# Altium PCB SixAxisEncoderFinARM R1.0.PcbDoc
Units mil, origin at the board's own origin, x right, y up, seen from the top; angles counter-clockwise.
Board outline 1710 x 2625 mil, 2 copper layers (Top Layer, Bottom Layer); 58 components, 57 nets, 286 pads, 158 vias.
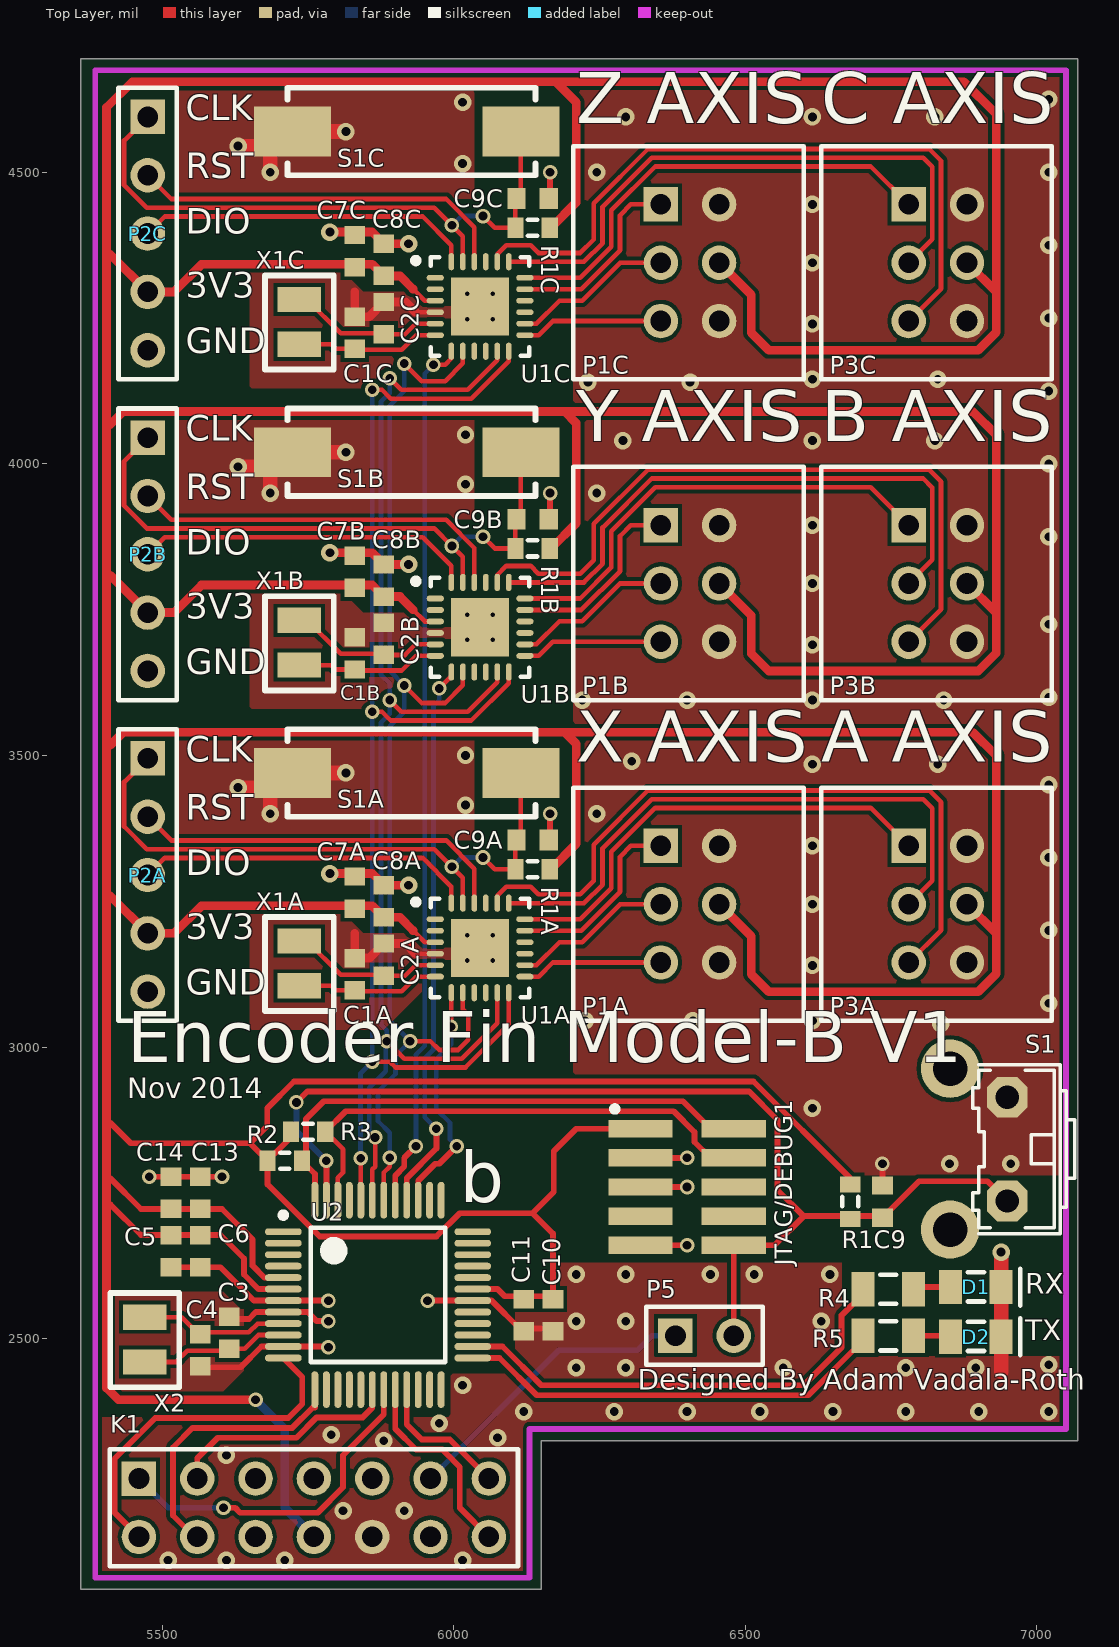
[diagram p0: Top Layer view]
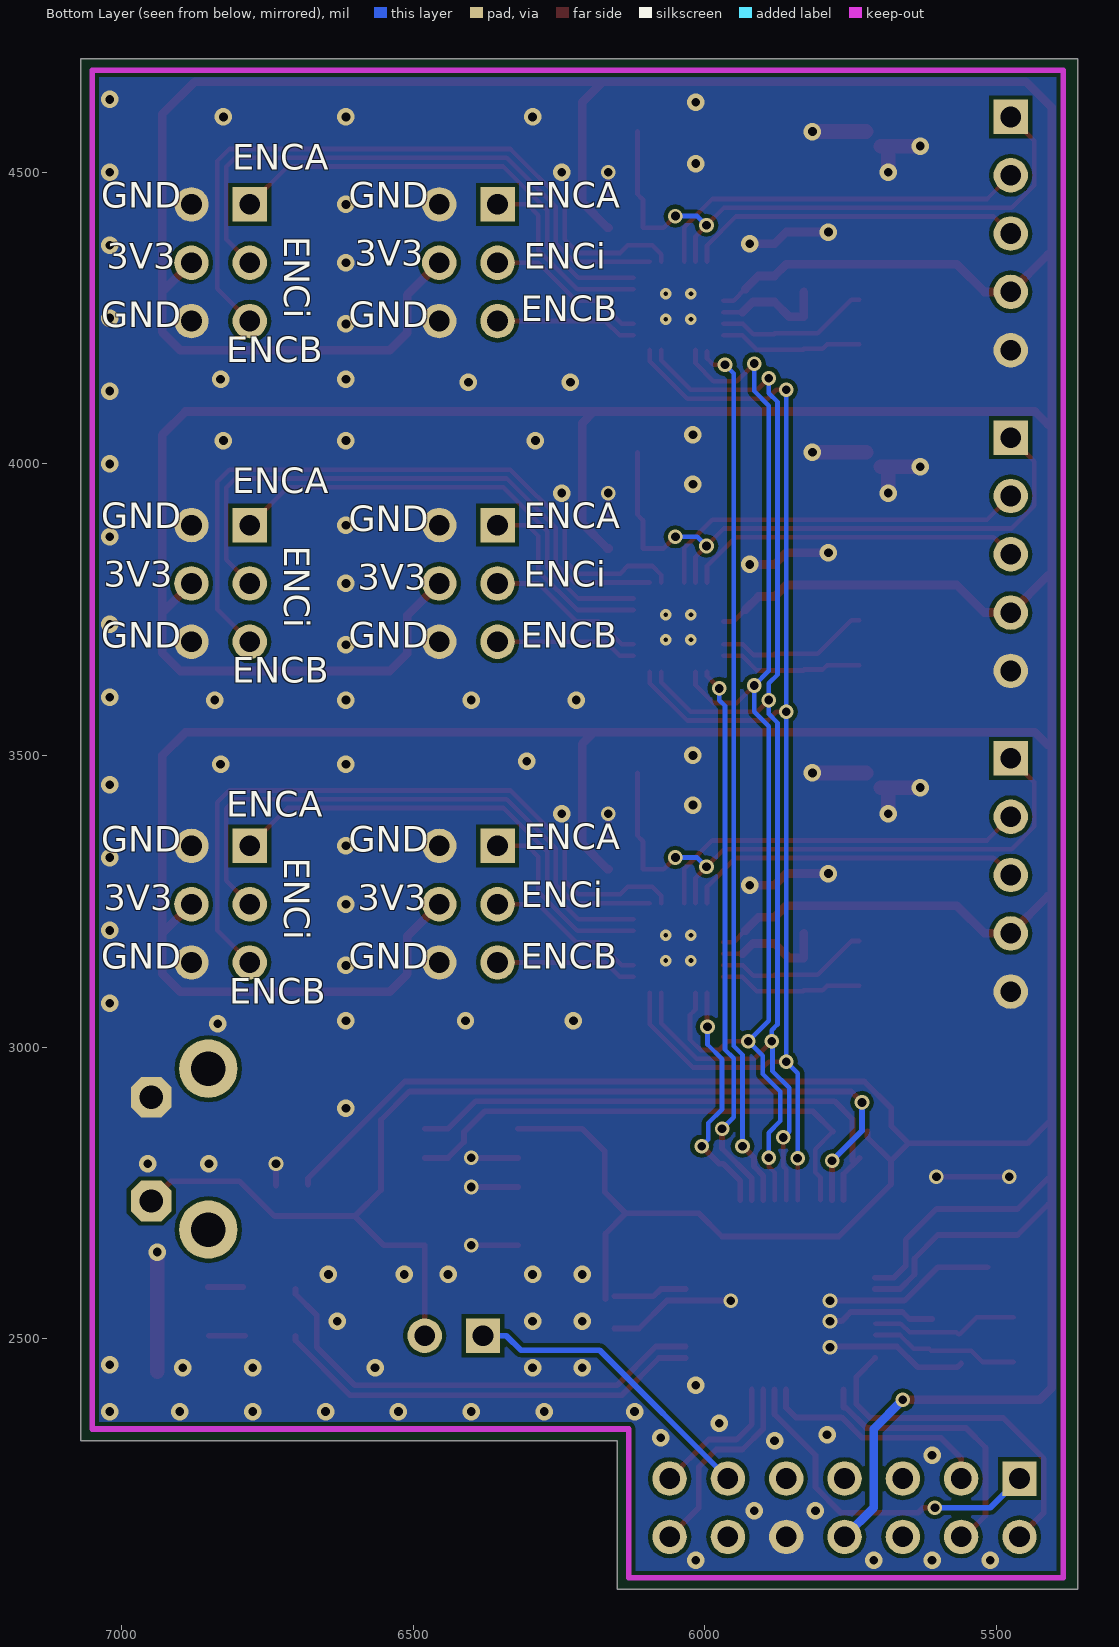
[diagram p1: Bottom Layer view, seen from below]

## Layer stack, top to bottom
Top Solder: solder mask 0.4, Solder Resist, Dk 3.5
Top Layer: signal copper 1.4
Dielectric 1: dielectric 12.6, FR-4, Dk 4.8
Bottom Layer: signal copper 1.4
Bottom Solder: solder mask 0.4, Solder Resist, Dk 3.5

## Board outline
5360,2070 6150,2070 6150,2325 7070,2325 7070,4695 5360,4695

## Design rules (kind name [scope] priority, off if disabled: settings)
Clearance [All] p1: gap=7
PlaneConnect [All] p1: planeconnectstyle=Direct reliefexpansion=20 reliefentries=4 reliefconductorwidth=10 reliefairgap=10
PolygonConnect [All] p1: connectstyle=Direct reliefconductorwidth=10 reliefentries=4 polygonreliefangle="90 Angle" airgapwidth=10
RoomDefinition U_EncoderFinARM-EncoderMCU1 [InComponentClass('U_EncoderFinARM-EncoderMCU1')] p1: confinementstyle=ConfineIn formatcopy=TRUE lockcomponents=FALSE outline 5375,3025 7050,3025 7050,3575 5375,3575
RoomDefinition U_EncoderFinARM-EncoderMCU2 [InComponentClass('U_EncoderFinARM-EncoderMCU2')] p2: confinementstyle=ConfineIn formatcopy=TRUE lockcomponents=FALSE outline 5375,3575 7050,3575 7050,4125 5375,4125
RoomDefinition U_EncoderFinARM-EncoderMCU3 [InComponentClass('U_EncoderFinARM-EncoderMCU3')] p3: confinementstyle=ConfineIn formatcopy=TRUE lockcomponents=FALSE outline 5375,4125 7050,4125 7050,4675 5375,4675
RoutingVias [All] p1: holewidth=15 width=25 viastyle="Through Hole" minholewidth=15 minwidth=25 maxholewidth=28 maxwidth=50
SolderMaskExpansion [All] p1: expansion=4
UnpouredPolygon [All] p1: allowunpoured=FALSE
Width [All] p1: maxlimit=50 minlimit=7 preferedwidth=8
28 further rules are at their usual default settings.

## Classes and differential pairs
component class "Encoder Fin ARM - System": C9 JTAG/DEBUG1 P5 R1 R2 R3 S1
component class U_EncoderFinARM-EncoderMCU1: C1A C2A C7A C8A C9A P1A P2A P3A R1A S1A U1A X1A
component class U_EncoderFinARM-EncoderMCU2: C1B C2B C7B C8B C9B P1B P2B P3B R1B S1B U1B X1B
component class U_EncoderFinARM-EncoderMCU3: C1C C2C C7C C8C C9C P1C P2C P3C R1C S1C U1C X1C
component class "U_Encoder Fin ARM - Kinen Connector": K1
component class "U_Encoder Fin ARM - MCU KL05 TQFP 48": C3 C4 C5 C6 C10 C11 C13 C14 D1 D2 R4 R5 U2 X2
net class SLAVE_SPI_SS[1..3]: SLAVE_SPI_SS1 SLAVE_SPI_SS2 SLAVE_SPI_SS3
channel class "Encoder Fin ARM - Encoder MCU": U_EncoderFinARM-EncoderMCU1 U_EncoderFinARM-EncoderMCU2 U_EncoderFinARM-EncoderMCU3

## Components (designator, comment, footprint, x,y, rotation, side; value= is the part's Value field where it differs from the comment)
C1A "0603" 1608[0603] 5830,3125 r90 top (schematic designator C1)
C1B "0603" 1608[0603] 5830,3675 r90 top (schematic designator C1)
C1C "0603" 1608[0603] 5830,4225 r90 top (schematic designator C1)
C2A "0603" 1608[0603] 5880,3150 r90 top (schematic designator C2)
C2B "0603" 1608[0603] 5880,3700 r90 top (schematic designator C2)
C2C "0603" 1608[0603] 5880,4250 r90 top (schematic designator C2)
C3 "0603" 1608[0603] 5615,2510 r90 top
C4 "0603" 1608[0603] 5565,2480 r270 top
C5 "0603" 1608[0603] 5515,2650 r90 top
C6 "0603" 1608[0603] 5565,2650 r90 top
C7A "0603" 1608[0603] 5830,3265 r270 top (schematic designator C7)
C7B "0603" 1608[0603] 5830,3815 r270 top (schematic designator C7)
C7C "0603" 1608[0603] 5830,4365 r270 top (schematic designator C7)
C8A "0603" 1608[0603] 5880,3250 r270 top (schematic designator C8)
C8B "0603" 1608[0603] 5880,3800 r270 top (schematic designator C8)
C8C "0603" 1608[0603] 5880,4350 r270 top (schematic designator C8)
C9 "Cap Semi" 1608[0603] 6735,2735 r270 top
C9A "Cap Semi" 1608[0603] 6135,3355 r180 top (schematic designator C9)
C9B "Cap Semi" 1608[0603] 6135,3905 r180 top (schematic designator C9)
C9C "Cap Semi" 1608[0603] 6135,4455 r180 top (schematic designator C9)
C10 "0603" 1608[0603] 6170,2540 r90 top
C11 "0603" 1608[0603] 6120,2540 r90 top
C13 "0603" 1608[0603] 5565,2750 r90 top
C14 "0603" 1608[0603] 5515,2750 r90 top
D1 "LED1" "SM 0805 polarized" 6975,2545 r180 top
D2 "LED1" "SM 0805 polarized" 6975,2460 r180 top
JTAG/DEBUG1 "ARM Cortex JTAG-DEBUG" FTSH-105-XX-X-DV 6400,2760 r90 top
K1 "Smart Kinen" "Kinen Fin - Smart Device" 6060,2160 r90 top
P1A "Header 3X2" "HDR2X3 Shrouded - Molex 0901301106" 6355,3345 r270 top (schematic designator P1)
P1B "Header 3X2" "HDR2X3 Shrouded - Molex 0901301106" 6355,3895 r270 top (schematic designator P1)
P1C "Header 3X2" "HDR2X3 Shrouded - Molex 0901301106" 6355,4445 r270 top (schematic designator P1)
P2A "Header 5" HDR1X5 5475,3495 r270 top (schematic designator P2)
P2B "Header 5" HDR1X5 5475,4045 r270 top (schematic designator P2)
P2C "Header 5" HDR1X5 5475,4595 r270 top (schematic designator P2)
P3A "Header 3X2" "HDR2X3 Shrouded - Molex 0901301106" 6780,3345 r270 top (schematic designator P3)
P3B "Header 3X2" "HDR2X3 Shrouded - Molex 0901301106" 6780,3895 r270 top (schematic designator P3)
P3C "Header 3X2" "HDR2X3 Shrouded - Molex 0901301106" 6780,4445 r270 top (schematic designator P3)
P5 "Header 2" HDR1X2 6380,2505 r0 top
R1 "Res3" J1-0603 6680,2735 r90 top
R1A "Res3" J1-0603 6135,3305 r0 top (schematic designator R1)
R1B "Res3" J1-0603 6135,3855 r0 top (schematic designator R1)
R1C "Res3" J1-0603 6135,4405 r0 top (schematic designator R1)
R2 "Res3" J1-0603 5710,2805 r180 top
R3 "Res3" J1-0603 5750,2855 r180 top
R4 "0805" "SM 0805 - gap trimmed" 6745,2585 r0 top
R5 "0805" "SM 0805 - gap trimmed" 6745,2505 r0 top
S1 "1571610-2" B3F-31XX 6900,2825 r90 top
S1A "TL3302BF180QG/TR" TL3302BF180QG/TR 6115,3470 r180 top (schematic designator S1)
S1B "TL3302BF180QG/TR" TL3302BF180QG/TR 6115,4020 r180 top (schematic designator S1)
S1C "TL3302BF180QG/TR" TL3302BF180QG/TR 6115,4570 r180 top (schematic designator S1)
U1A "MKL05Z16VFK4 - VQFN24" 98ASA00474D 6045,3170 r0 top (schematic designator U1)
U1B "MKL05Z16VFK4 - VQFN24" 98ASA00474D 6045,3720 r0 top (schematic designator U1)
U1C "MKL05Z16VFK4 - VQFN24" 98ASA00474D 6045,4270 r0 top (schematic designator U1)
U2 "MKL05Z32VLF4" MKL05Z32VLF4 5870,2575 r0 top
X1A "ABS07-32.768KHZ-T" ABS07-32.768KHZ-T 5735,3105 r90 top (schematic designator X1)
X1B "ABS07-32.768KHZ-T" ABS07-32.768KHZ-T 5735,3655 r90 top (schematic designator X1)
X1C "ABS07-32.768KHZ-T" ABS07-32.768KHZ-T 5735,4205 r90 top (schematic designator X1)
X2 "ABS07-32.768KHZ-T" ABS07-32.768KHZ-T 5470,2460 r90 top

## Footprints (in the part's own frame and the unit in brackets; to place one, negate y for a bottom-side part, rotate by r counter-clockwise, add the part's x,y. Pads: shape width x height; smd on the part's side, far side on the other; paste and mask are expansions set on the pad)
98ASA00474D [mm] "QFN, 24-Leads, Body 3.98x3.98mm, Pitch 0.50mm, Thermal Pad 2.80x2.80mm, IPC Medium Density"
  oval 0.75x0.25 smd: 1(-1.95,1.25) 2(-1.95,0.75) 3(-1.95,0.25) 4(-1.95,-0.25) 5(-1.95,-0.75) 6(-1.95,-1.25) 13(1.95,-1.25) 14(1.95,-0.75) 15(1.95,-0.25) 16(1.95,0.25) 17(1.95,0.75) 18(1.95,1.25)
  oval 0.25x0.75 smd: 7(-1.25,-1.95) 8(-0.75,-1.95) 9(-0.25,-1.95) 10(0.25,-1.95) 11(0.75,-1.95) 12(1.25,-1.95) 19(1.25,1.95) 20(0.75,1.95) 21(0.25,1.95) 22(-0.25,1.95) 23(-0.75,1.95) 24(-1.25,1.95)
  rect 2.54x2.54 smd: 25(0,0)
  silkscreen extent -2.92,-2.15 2.15,2.15, body extent -2,-2 2,2, height 1
1608[0603] [mm] "Chip Capacitor, Body 1.6x0.8mm, IPC High Density"
  rect 0.8x0.9 smd: 1(-0.7,0) 2(0.7,0)
  body extent -0.87,-0.48 0.87,0.48, height 1.3
ABS07-32.768KHZ-T [mm] "ABS07-32.768KHZ-T Crystal Oscillator"
  rect 1.1x1.9 smd: 1(0,0) 2(1.95,0)
  silkscreen extent -1.1,-1.5 3,1.5
B3F-31XX [mil]
  oct 70x70 hole 40: 1(-89,-49) 2(89,-49)
  round 100 hole 59: 3(-138,49) 4(138,49)
  silkscreen extent -145,-165 145,10, body extent -165,-200 165,109, height 303
FTSH-105-XX-X-DV [mm] "1.27mm pitch, 10 pin, terminal strip; vertical, SMT"
  rect 0.75x2.8 smd mask+0: 1(2.54,2.03) 2(2.54,-2.03) 3(1.27,2.03) 4(1.27,-2.03) 5(0,2.03) 6(0,-2.03) 7(-1.27,2.03) 8(-1.27,-2.03) 9(-2.54,2.03) 10(-2.54,-2.03)
  silkscreen extent 3.28,3.03 3.52,3.27
HDR1X2 [mm] "Connector; Header; 2 Position"
  rect 1.5x1.5 hole 0.9: 1(0,0)
  round 1.5 hole 0.9: 2(2.54,0)
  silkscreen extent -1.27,-1.27 3.81,1.27
HDR1X5 [mm] "Connector; Header; 5 Position"
  rect 1.5x1.5 hole 0.9: 1(0,0)
  round 1.5 hole 0.9: 2(2.54,0) 3(5.08,0) 4(7.62,0) 5(10.16,0)
  silkscreen extent -1.27,-1.27 11.43,1.27
"HDR2X3 Shrouded - Molex 0901301106" [mm] "Connector; Header; 3x2 Position Molex 0901301106"
  rect 1.5x1.5 hole 0.9: 1(0,0)
  round 1.5 hole 0.9: 2(0,2.54) 3(2.54,0) 4(2.54,2.54) 5(5.08,0) 6(5.08,2.54)
  silkscreen extent -2.54,-3.81 7.62,6.22, body extent -2.44,-3.65 7.52,6.1, height 8.35
J1-0603 [mm] "Chip Resistor, Body 1.6x0.8mm, IPC High Density"
  rect 0.7x0.9 smd: 1(-0.75,0) 2(0.75,0)
  silkscreen extent -0.2,-0.35 0.2,0.35, body extent -0.85,-0.48 0.85,0.48, height 0.9
"Kinen Fin - Smart Device" [mm]
  rect 1.5x1.5 hole 0.9: 1(2.54,15.24)
  round 1.5 hole 0.9: 2(0,15.24) 3(2.54,12.7) 4(0,12.7) 5(2.54,10.16) 6(0,10.16) 7(2.54,7.62) 8(0,7.62) 9(2.54,5.08) 10(0,5.08) 11(2.54,2.54) 12(0,2.54) 13(2.54,0) 14(0,0)
  silkscreen extent -1.27,-1.27 3.81,16.51
MKL05Z32VLF4 [mm] "TSQFP, 48-Leads, Body 7.00x7.00mm, Pitch 0.50mm, IPC Medium Density"
  oval 1.6x0.3 smd: 1(-4.125,2.75) 2(-4.125,2.25) 3(-4.125,1.75) 4(-4.125,1.25) 5(-4.125,0.75) 6(-4.125,0.25) 7(-4.125,-0.25) 8(-4.125,-0.75) 9(-4.125,-1.25) 10(-4.125,-1.75) 11(-4.125,-2.25) 12(-4.125,-2.75) 25(4.125,-2.75) 26(4.125,-2.25) 27(4.125,-1.75) 28(4.125,-1.25) 29(4.125,-0.75) 30(4.125,-0.25) 31(4.125,0.25) 32(4.125,0.75) 33(4.125,1.25) 34(4.125,1.75) 35(4.125,2.25) 36(4.125,2.75)
  oval 0.3x1.6 smd: 13(-2.75,-4.125) 14(-2.25,-4.125) 15(-1.75,-4.125) 16(-1.25,-4.125) 17(-0.75,-4.125) 18(-0.25,-4.125) 19(0.25,-4.125) 20(0.75,-4.125) 21(1.25,-4.125) 22(1.75,-4.125) 23(2.25,-4.125) 24(2.75,-4.125) 37(2.75,4.125) 38(2.25,4.125) 39(1.75,4.125) 40(1.25,4.125) 41(0.75,4.125) 42(0.25,4.125) 43(-0.25,4.125) 44(-0.75,4.125) 45(-1.25,4.125) 46(-1.75,4.125) 47(-2.25,4.125) 48(-2.75,4.125)
  silkscreen extent -4.25,-2.93 2.93,3.6, body extent -3.5,-3.5 3.5,3.5, height 1.6
"SM 0805 - gap trimmed" [mm]
  rect 1x1.5 smd: 1(-1.1,0) 2(1.1,0)
  silkscreen extent -0.36,-0.64 0.35,0.63
"SM 0805 polarized" [mm]
  rect 1x1.5 smd: 1(0.93,-1.105) 2(3.13,-1.105)
  silkscreen extent 0.1,-1.9 2.38,-0.3
TL3302BF180QG/TR [mm] "Tactile Switch Tiny"
  rect 3.35x2.16 smd: 1(0,0) 2(9.95,0)
  silkscreen extent -0.64,-1.91 10.16,1.91, body extent -0.27,-1.75 9.93,1.75

## Part data
C1A C1B C1C C2A C2B C2C C3 C4 C5 C6 C7A C7B C7C C8A C8B C8C C10 C11 C13 C14: library part "Cap Semi", "Capacitor (Semiconductor SIM Model)"
C9 C9A C9B C9C: "Capacitor (Semiconductor SIM Model)"
D1 D2: "Typical RED GaAs LED"
JTAG/DEBUG1: library part "ARM Cortex JTAG-DEBUG Header"
K1: library part "Kinen Device NEW Smart"
P1A P1B P1C P3A P3B P3C: "Header, 3-Pin, Dual row"
P2A P2B P2C: "Header, 5-Pin"
P5: "Header, 2-Pin"
R1 R1A R1B R1C R2 R3: "Resistor"
R4 R5: library part Res3, "Resistor"
S1: library part 1571610-2_1, "SWTCH Momentary Washable"
S1A S1B S1C: "Tactile Switch Tiny"
U1A U1B U1C: library part "MKL05Z16VFK4 - 24 Pin VQFN", "ARM Cortex M0+"
U2: "ARM Cortex M0+"
X1A X1B X1C X2: "ABS07-32.768KHZ-T RTC Crystal Oscillator"

## Via types
v1: diameter 30, hole 15, Top Layer to Bottom Layer, tented both sides, 105 vias
v2: diameter 25, hole 15, Top Layer to Bottom Layer, tented both sides, 41 vias
v3: diameter 19.68, hole 7.87, Top Layer to Bottom Layer, tented bottom, 12 vias

## Nets (pads, with @x,y where several pads share a name; then routed paths per layer and width w, separated by ;. In a path a pad name is that pad's centre, name@x,y a point inside that pad or via, vN(x,y) a via of type N, cw(c..) or ccw(c..) an arc to the next point about the centre after c; other vN are vias at no path point)
3.3VCC: C5.2 C6.2 C7A.2 C7B.2 C7C.2 C8A.2 C8B.2 C8C.2 C10.2 C11.2 C13.1 C14.1 JTAG/DEBUG1.1 K1.8 P1A.4 P1B.4 P1C.4 P2A.4 P2B.4 P2C.4 P3A.4 P3B.4 P3C.4 R1.2 R1A.2 R1B.2 R1C.2 R2.2 R3.2 U1A.3 U1B.3 U1C.3 U2.5 U2.6 U2.31 | length 16615.8
  Top Layer w8: 5930,3200 5950.16,3179.84 U1A.3 ; 5930,3750 5950.16,3729.84 U1B.3 ; 5930,4300 5950.16,4279.84 U1C.3
  Top Layer w10: 5410.97,2730 5463.41,2677.56 C5.2 C6.2 5600,2677.56 5640,2637.56 5640,2610 5665.16,2584.84 U2.6 ; 5410.97,2775 5463.53,2722.44 C14.1 C13.1 5602.56,2722.44 5655,2670 5655,2625 5675.47,2604.53 U2.5 ; 5410.97,2870 5445.97,2835 5650.47,2835 ; R3.2 5720.47,2845 R2.2 ; U2.31 6075.16,2584.84 6087.44,2572.56 C10.2@6155,2572.56 ; C10.2 6170,2680 6135,2715 ; JTAG/DEBUG1.1 6210,2860 6171.25,2821.25 6171.25,2751.25 6135,2715 ; R1.2 6680,2775 6514,2941 5726,2941 5680,2895 5680,2864.53 5650.47,2835 ; 5650.47,2835 R2.2 ; R2.2 5680.47,2764.53 5770,2675 5970,2675 6010,2715 6135,2715
  Top Layer w15: 5410.97,3259.03 P2A.4 5520,3195 5567.44,3242.44 5860,3242.44 C8A.2 5907.56,3222.44 5930,3200 ; 5410.97,3517.6 5433.37,3540 6190,3540 ; 5410.97,3809.03 P2B.4 5520,3745 5567.44,3792.44 5860,3792.44 C8B.2 5907.56,3772.44 5930,3750 ; 5410.97,4067.6 5433.37,4090 6190,4090 ; 5410.97,4359.03 P2C.4 5520,4295 5567.44,4342.44 5860,4342.44 C8C.2 5907.56,4322.44 5930,4300 ; v2(5660,2395) 5425,2395 5404.5,2415.5 5404.5,4611.13 5448.87,4655.5 6174.5,4655.5 ; R1A.2 6166.53,3305 6210,3348.47 6210,3520 6190,3540 ; R1B.2 6166.53,3855 6210,3898.47 6210,4070 6190,4090 ; R1C.2 6166.53,4405 6210,4448.47 6210,4620 6174.5,4655.5 ; P1A.4 6510,3190 6510,3125 6540,3095 6899.34,3095 6930,3125.66 6930,3195 ; P1B.4 6510,3740 6510,3675 6540,3645 6899.34,3645 6930,3675.66 6930,3745 ; P1C.4 6510,4290 6510,4225 6540,4195 6899.34,4195 6930,4225.66 6930,4295 ; P3A.4 6930,3195 ; P3B.4 6930,3745 ; P3C.4 6930,4295 ; 6174.5,4655.5 6874.5,4655.5 6930,4600 6930,4295 ; 6190,3540 6890,3540 6930,3500 6930,3195 ; 6190,4090 6890,4090 6930,4050 6930,3745
  Bottom Layer w15: v2(5660,2395) 5710,2345 5710,2210 K1.8
EXTAL0: C4.1 U2.9 X2.2 | length 257.2
  Top Layer w8: X2.2 5533.23,2536.77 5562.44,2507.56 C4.1 5568.25,2510.81 5648.44,2510.81 5663.41,2525.79 U2.9
GND: C1A.2 C1B.2 C1C.2 C2A.2 C2B.2 C2C.2 C3.2 C4.2 C5.1 C6.1 C7A.1 C7B.1 C7C.1 C8A.1 C8B.1 C8C.1 C9.1 C9A.1 C9B.1 C9C.1 C10.1 C11.1 C13.2 C14.2 D1.1 D2.1 JTAG/DEBUG1.3 JTAG/DEBUG1.5 JTAG/DEBUG1.9 K1.10 P1A.2 P1A.6 P1B.2 P1B.6 P1C.2 P1C.6 P2A.5 P2B.5 P2C.5 P3A.2 P3A.6 P3B.2 P3B.6 P3C.2 P3C.6 S1.2 S1A.2 S1B.2 S1C.2 U1A.4 U1A.25 U1B.4 U1B.25 U1C.4 U1C.25 U2.7 U2.8 U2.11 U2.30 | length 3086.3
  Top Layer w8: 5934.84,3160.16 U1A.4 ; 5934.84,4260.16 U1C.4
  Top Layer w10: v2(5477.56,2777.56) C14.2 C13.2 v2(5602.44,2777.56) ; C5.1 C6.1 5600,2622.44 5657.28,2565.16 U2.7 v2@5784.84,2565.16 ; C4.2@5560,2457.44 5566.65,2450.8 5634.64,2450.8 5670.26,2486.42 U2.11 v2@5783.58,2486.42 ; C3.2@5610.29,2533.66 5648.66,2533.66 5660.47,2545.47 U2.8 5749.53,2545.47 5765,2530 v2(5785,2530) ; v2@5955.16,2565.16 U2.30 6064.84,2565.16 6112.56,2517.44 C10.1@6155,2517.44 ; C9A.1 6165,3357.44 v2(6165,3400) ; C9B.1 6165,3907.44 v2(6165,3950) ; C9C.1 6165,4457.44 v2(6165,4500) ; JTAG/DEBUG1.9 v2(6400,2660) ; JTAG/DEBUG1.5 v2(6400,2760) ; JTAG/DEBUG1.3 v2(6400,2810) ; C9.1 v2(6735,2800)
  Top Layer w15: v1(5787.56,3297.56) 5860,3297.56 C8A.1 v1(5922.44,3277.56) ; v1(5787.56,3847.56) 5860,3847.56 C8B.1 v1(5922.44,3827.56) ; v1(5787.56,4397.56) 5860,4397.56 C8C.1 v1(5922.44,4377.56) ; 5830,3195 C1A.2 5855,3152.56 C2A.2 5917.44,3177.56 5934.84,3160.16 ; 5830,4295 C1C.2 5855,4252.56 C2C.2 5917.44,4277.56 5934.84,4260.16
  Top Layer w25: v1(5630,3445) S1A.2@5698.27,3445 ; v1(5630,3995) S1B.2@5698.27,3995 ; v1(5630,4545) S1C.2@5698.27,4545 ; v1(5685,3400) S1A.2@5685,3431.73 ; v1(5685,3950) S1B.2@5685,3981.73 ; v1(5685,4500) S1C.2@5685,4531.73 ; S1A.2 v1(5815,3470) ; S1B.2 v1(5815,4020) ; S1C.2 v1(5815,4570) ; 6938.39,2443.62 D2.1 D1.1 v1(6938.39,2648.39)
  other v1: 5510,2120 5610,2120 5710,2120 6015,2120 5810,2205 5915,2205 5610,2300 5880,2325 6075,2330 5790,2335 5975,2355 6120,2375 6275,2375 6400,2375 6525,2375 6650,2375 6775,2375 6900,2375 7020,2375 6015,2420 6210,2450 6295,2450 6565,2450 6775,2450 6895,2450 7020,2455 6210,2530 6295,2530 6630,2530 6210,2610 6295,2610 6440,2610 6515,2610 6645,2610 6850,2800 6955,2800 6615,2895 6835,3040 6225,3045 6410,3045 6615,3045 7020,3075 6615,3140 7020,3200 6615,3245 7020,3325 6615,3345 6245,3400 6020,3415 7020,3450 6615,3485 6830,3485 6305,3490 6020,3500 6220,3595 6400,3595 6615,3595 6840,3595 7020,3600 6615,3690 7020,3725 6615,3795 7020,3875 6615,3895 6245,3950 6020,3965 7020,4000 6290,4040 6615,4040 6825,4040 6020,4050 7020,4125 6230,4140 6405,4140 6615,4145 6830,4145 6615,4240 7020,4250 6615,4345 7020,4375 6615,4445 6245,4500 7020,4500 6015,4515 6295,4595 6615,4595 6825,4595 6015,4620 7020,4625
  other v2: 5785,2485 5785,2565 5955,2565
  other v3: 6023.35,3148.35 6066.65,3148.35 6023.35,3191.65 6066.65,3191.65 6023.35,3698.35 6066.65,3698.35 6023.35,3741.65 6066.65,3741.65 6023.35,4248.35 6066.65,4248.35 6023.35,4291.65 6066.65,4291.65
KSPI_MISO: K1.4 U2.13 | length 485
  Top Layer w10: K1.4@5565,2150 5518.47,2196.53 5518.47,2313.47 5552,2347 5722.96,2347 5757.96,2382 5761.73,2382 U2.13
KSPI_MOSI: K1.2 U2.12 | length 604.1
  Top Layer w10: K1.2 5418.47,2201.53 5418.47,2294.5 5487.97,2364 5715.92,2364 5740,2388.08 5740,2434.33 U2.12
KSPI_SCLK: K1.3 U2.18 | length 402.2
  Top Layer w10: K1.3 5560,2295 5595,2330 5730,2330 5765,2365 5843.79,2365 5860.16,2381.37 U2.18
KSPI_SS: K1.1 U2.19 | length 588.8
  Top Layer w10: v2(5605,2210) 5625,2210 5633.47,2201.53 5766.53,2201.53 5810,2245 5810,2300 5879.84,2369.84 U2.19
  Bottom Layer w10: K1.1 5510,2210 v2(5605,2210)
NetC1A_1: C1A.1 U1A.6 X1A.1 | length 248.5
  Top Layer w8: X1A.1 5790,3105 5797.56,3097.44 C1A.1 5830,3095.69 5910.69,3095.69 5935.79,3120.79 U1A.6
NetC1B_1: C1B.1 U1B.6 X1B.1 | length 248.5
  Top Layer w8: X1B.1 5790,3655 5797.56,3647.44 C1B.1 5830,3645.69 5910.69,3645.69 5935.79,3670.79 U1B.6
NetC1C_1: C1C.1 U1C.6 X1C.1 | length 248.5
  Top Layer w8: X1C.1 5790,4205 5797.56,4197.44 C1C.1 5830,4195.69 5910.69,4195.69 5935.79,4220.79 U1C.6
NetC2A_1: C2A.1 U1A.5 X1A.2 | length 266.3
  Top Layer w8: X1A.2 5748.23,3181.77 5805.81,3124.19 5880,3124.19 C2A.1 5916.23,3122.44 5934.26,3140.47 U1A.5
NetC2B_1: C2B.1 U1B.5 X1B.2 | length 266.3
  Top Layer w8: X1B.2 5748.23,3731.77 5805.81,3674.19 5880,3674.19 C2B.1 5916.23,3672.44 5934.26,3690.47 U1B.5
NetC2C_1: C2C.1 U1C.5 X1C.2 | length 266.3
  Top Layer w8: X1C.2 5748.23,4281.77 5805.81,4224.19 5880,4224.19 C2C.1 5916.23,4222.44 5934.26,4240.47 U1C.5
NetC9A_2: C9A.2 P2A.1 R1A.1 S1A.1 U1A.23 | length 1087.1
  Top Layer w8: P2A.1 5434.47,3454.47 5434.47,3378.21 5473.38,3339.31 5966.68,3339.31 v2(5996.77,3309.21) 6015.47,3290.51 U1A.23 ; v2(6050,3325) 6070,3305 R1A.1 6105.47,3353.03 C9A.2 6115,3362.56 S1A.1
  Bottom Layer w8: v2(5996.77,3309.21) 6012.56,3325 v2(6050,3325)
NetC9B_2: C9B.2 P2B.1 R1B.1 S1B.1 U1B.23 | length 1087.1
  Top Layer w8: P2B.1 5434.47,4004.47 5434.47,3928.21 5473.38,3889.31 5966.68,3889.31 v2(5996.77,3859.21) 6015.47,3840.51 U1B.23 ; v2(6050,3875) 6070,3855 R1B.1 6105.47,3903.03 C9B.2 6115,3912.56 S1B.1
  Bottom Layer w8: v2(5996.77,3859.21) 6012.56,3875 v2(6050,3875)
NetC9C_2: C9C.2 P2C.1 R1C.1 S1C.1 U1C.23 | length 1087.1
  Top Layer w8: P2C.1 5434.47,4554.47 5434.47,4478.21 5473.38,4439.31 5966.68,4439.31 v2(5996.77,4409.21) 6015.47,4390.51 U1C.23 ; v2(6050,4425) 6070,4405 R1C.1 6105.47,4453.03 C9C.2 6115,4462.56 S1C.1
  Bottom Layer w8: v2(5996.77,4409.21) 6012.56,4425 v2(6050,4425)
NetD1_2: D1.2 R4.2 | length 60
  Top Layer w10: R4.2@6791.81,2588.5 D1.2
NetD2_2: D2.2 R5.2 | length 62
  Top Layer w10: R5.2 D2.2@6850.28,2505
NetK1_11: K1.11 P5.1 | length 521.5
  Bottom Layer w10: K1.11 6180,2480 6315,2480 6340,2505 P5.1
NetK1_13: K1.13 U2.21 | length 239
  Top Layer w10: U2.21 5919.21,2352.79 5945,2327 5993,2327 K1.13
NetK1_14: K1.14 U2.20 | length 345.4
  Top Layer w10: U2.20 5899.53,2345.47 5935,2310 5980,2310 6010,2280 6010,2210 K1.14
NetP1A_1: P1A.1 U1A.17 | length 328.7
  Top Layer w8: U1A.17 6218.31,3199.53 6285,3266.21 6285,3326.36 6303.64,3345 P1A.1
NetP1A_3: P1A.3 U1A.14 | length 276.5
  Top Layer w8: U1A.14 6141.69,3140.47 6181.21,3180 6220,3180 6285,3245 P1A.3
NetP1A_5: P1A.5 U1A.13 | length 243.3
  Top Layer w8: U1A.13 6145.79,3120.79 6170,3145 P1A.5
NetP1B_1: P1B.1 U1B.17 | length 328.7
  Top Layer w8: U1B.17 6218.31,3749.53 6285,3816.21 6285,3876.36 6303.64,3895 P1B.1
NetP1B_3: P1B.3 U1B.14 | length 276.5
  Top Layer w8: U1B.14 6141.69,3690.47 6181.21,3730 6220,3730 6285,3795 P1B.3
NetP1B_5: P1B.5 U1B.13 | length 243.3
  Top Layer w8: U1B.13 6145.79,3670.79 6170,3695 P1B.5
NetP1C_1: P1C.1 U1C.17 | length 328.7
  Top Layer w8: U1C.17 6218.31,4299.53 6285,4366.21 6285,4426.36 6303.64,4445 P1C.1
NetP1C_3: P1C.3 U1C.14 | length 276.5
  Top Layer w8: U1C.14 6141.69,4240.47 6181.21,4280 6220,4280 6285,4345 P1C.3
NetP1C_5: P1C.5 U1C.13 | length 243.3
  Top Layer w8: U1C.13 6145.79,4220.79 6170,4245 P1C.5
NetP2A_2: P2A.2 U1A.22 | length 656.1
  Top Layer w8: P2A.2 5515.69,3354.31 5986.68,3354.31 6035.16,3305.83 U1A.22
NetP2A_3: P2A.3 U1A.24 | length 581.7
  Top Layer w8: P2A.3 5504.31,3324.31 5946.68,3324.31 5995.79,3275.2 U1A.24
NetP2B_2: P2B.2 U1B.22 | length 656.1
  Top Layer w8: P2B.2 5515.69,3904.31 5986.68,3904.31 6035.16,3855.83 U1B.22
NetP2B_3: P2B.3 U1B.24 | length 581.7
  Top Layer w8: P2B.3 5504.31,3874.31 5946.68,3874.31 5995.79,3825.2 U1B.24
NetP2C_2: P2C.2 U1C.22 | length 656.1
  Top Layer w8: P2C.2 5515.69,4454.31 5986.68,4454.31 6035.16,4405.83 U1C.22
NetP2C_3: P2C.3 U1C.24 | length 581.7
  Top Layer w8: P2C.3 5504.31,4424.31 5946.68,4424.31 5995.79,4375.2 U1C.24
NetP3A_1: P3A.1 U1A.18 | length 800.6
  Top Layer w8: U1A.18 6216.79,3219.21 6270,3272.43 6270,3334.61 6345.39,3410 6715,3410 P3A.1
NetP3A_3: P3A.3 U1A.19 | length 1024.3
  Top Layer w8: U1A.19 6223.13,3246.77 6255,3278.64 6255,3340.82 6339.18,3425 6805,3425 6820.53,3409.47 6820.53,3285.53 P3A.3
NetP3A_5: P3A.5 U1A.20 | length 1201.9
  Top Layer w8: U1A.20 6074.53,3259.53 6090,3275 6131.77,3275 6145,3261.77 6216.92,3261.77 6240,3284.85 6240,3347.04 6332.96,3440 6815,3440 6835.53,3419.47 6835.53,3200.53 P3A.5
NetP3B_1: P3B.1 U1B.18 | length 800.6
  Top Layer w8: U1B.18 6216.79,3769.21 6270,3822.43 6270,3884.61 6345.39,3960 6715,3960 P3B.1
NetP3B_3: P3B.3 U1B.19 | length 1024.3
  Top Layer w8: U1B.19 6223.13,3796.77 6255,3828.64 6255,3890.82 6339.18,3975 6805,3975 6820.53,3959.47 6820.53,3835.53 P3B.3
NetP3B_5: P3B.5 U1B.20 | length 1201.9
  Top Layer w8: U1B.20 6074.53,3809.53 6090,3825 6131.77,3825 6145,3811.77 6216.92,3811.77 6240,3834.85 6240,3897.04 6332.96,3990 6815,3990 6835.53,3969.47 6835.53,3750.53 P3B.5
NetP3C_1: P3C.1 U1C.18 | length 800.6
  Top Layer w8: U1C.18 6216.79,4319.21 6270,4372.43 6270,4434.61 6345.39,4510 6715,4510 P3C.1
NetP3C_3: P3C.3 U1C.19 | length 1024.3
  Top Layer w8: U1C.19 6223.13,4346.77 6255,4378.64 6255,4440.82 6339.18,4525 6805,4525 6820.53,4509.47 6820.53,4385.53 P3C.3
NetP3C_5: P3C.5 U1C.20 | length 1201.9
  Top Layer w8: U1C.20 6074.53,4359.53 6090,4375 6131.77,4375 6145,4361.77 6216.92,4361.77 6240,4384.85 6240,4447.04 6332.96,4540 6815,4540 6835.53,4519.47 6835.53,4300.53 P3C.5
NetR4_1: R4.1 U2.26 | length 802.2
  Top Layer w10: U2.26 6083.58,2486.42 6150,2420 6600,2420 6665,2485 6665,2540 6701.69,2576.69 R4.1
NetR5_1: R5.1 U2.25 | length 742.8
  Top Layer w10: U2.25 6078.27,2466.73 6142,2403 6608,2403 6701.69,2496.69 R5.1
NetU1A_8: U1A.8 U1B.8 U1C.8 U2.42 | length 2010.2
  Top Layer w8: U2.42 5879.84,2784.84 5890,2795 v2(5890,2810) ; v2(5915,3620) 5945,3590 5985,3590 6015.47,3620.47 U1B.8 ; v2(5915,4172) 5945,4142 5985,4142 6015.47,4172.47 U1C.8@6015.47,4195.23 ; v2(5925,3010) 5960,3010 5975,2995 6007.57,2995 6025,3012.43 6025,3055 6015.47,3064.53 U1A.8
  Bottom Layer w8: v2(5890,2810) 5890,2853.23 5870,2873.23 5870,2923.79 5900,2953.79 5900,2985 v2(5925,3010) 5890,3045 5890,3550 5915,3575 v2(5915,3620) 5890,3645 5890,4100 5915,4125 v2(5915,4172)
NetU1A_11: U1A.11 U1B.11 U1C.11 U2.43 | length 2186.7
  Top Layer w8: U2.43 5860.16,2790.16 5865,2795 v2(5865,2845) ; v2(5885,3010) 5915,2980 6013.79,2980 6074.53,3040.74 U1A.11 ; v2(5890,3595) 5910,3575 6023.79,3575 6074.53,3625.74 U1B.11 ; v2(5890,4147) 5910,4127 6023.79,4127 6074.53,4177.74 U1C.11@6074.53,4195.23
  Bottom Layer w8: v2(5865,2845) 5855,2855 5855,2930 5883.5,2958.5 5883.5,3002 v2@5885,3003.5 ; v2(5885,3010) 5885,3028.79 5875,3038.79 5875,3556.21 5890,3571.21 v2(5890,3595) 5890,3623.79 5875,3638.79 5875,4106.21 5890,4121.21 v2(5890,4147)
NetU1A_12: U1A.12 U1B.12 U1C.12 U2.44 | length 2293.3
  Top Layer w8: U2.44 v2(5840.47,2809.53) ; v2(5860,2975) 5890,2975 5900,2965 6020,2965 6094.21,3039.21 U1A.12 ; v2(5860,3575) 5876.77,3575 5891.77,3560 6030,3560 6094.21,3624.21 U1B.12 ; v2(5860,4127) 5876.77,4127 5891.77,4112 6030,4112 6094.21,4176.21 U1C.12@6094.21,4195.23
  Bottom Layer w8: v2(5840.47,2809.53) 5840,2810 5840,2955 v2(5860,2975) v2(5860,3575) v2(5860,4127)
RESET: C9.2 JTAG/DEBUG1.10 P5.2 R1.1 S1.1 U2.47 | length 1909.4
  Top Layer w10: v2(5730,2905) 5749,2924 6506,2924 6555,2875 6555,2755 6600,2710 ; U2.47 v2(5781.42,2805) ; P5.2@6479.92,2505 JTAG/DEBUG1.10 6550,2660 6600,2710 ; S1.1 6915,2770 6797.56,2770 6737.56,2710 6600,2710
  Bottom Layer w10: v2(5730,2905) 5730,2856.42 v2(5781.42,2805)
SLAVE_SPI_SS1: U1A.7 U2.39 | length 412.4
  Top Layer w8: v2@5995.79,3035.79 U1A.7
  Top Layer w10: U2.39 5938.9,2770.81 5968.08,2800 5975,2800 v2(6005,2830) ; v2(5995,3035) v2@5995.79,3035.79
  Bottom Layer w8: v2(5995,3035) 5995,3004.34 5970,2979.34 5970,2893.23 5993.5,2869.73 5993.5,2841.5 v2(6005,2830)
SLAVE_SPI_SS2: U1B.7 U2.40 | length 954.1
  Top Layer w8: v2(5975,3615) 5995.79,3635.79 U1B.7
  Top Layer w10: U2.40 5919.21,2775.17 5970,2825.96 v2(5970,2860)
  Bottom Layer w8: v2(5970,2860) 5950,2880 5950,2980.55 5965,2995.55 5965,3585 5975,3595 v2(5975,3615)
SLAVE_SPI_SS3: U1C.7 U2.41 | length 1507.4
  Top Layer w8: v2(5965,4170) 5985,4170 5995.79,4180.79 U1C.7
  Top Layer w10: U2.41 5899.53,2779.53 5915,2795 5915,2810 v2(5935,2830)
  Bottom Layer w8: v2(5935,2830) 5935,2986.77 5950,3001.77 5950,4155 v2(5965,4170)
TCK/SWDCLK: JTAG/DEBUG1.4 R3.1 U2.46 | length 891.7
  Top Layer w8: R3.1@5779.76,2855.24 5810,2825 5810,2785 5801.1,2776.1 U2.46
  Top Layer w10: R3.1@5779.76,2855.24 5814.53,2890 6376.93,2890 6412.8,2854.13 6412.8,2837.2 6440,2810 JTAG/DEBUG1.4
TMS/SWDIO: JTAG/DEBUG1.2 R2.1 U2.48 | length 927.2
  Top Layer w10: R2.1@5734.53,2809.53 5761.73,2782.32 U2.48 ; R2.1 5746.25,2805 5746.25,2876.25 5777,2907 6393,2907 6440,2860 JTAG/DEBUG1.2
XTAL0: C3.1 U2.10 X2.1 | length 256.7
  Top Layer w8: X2.1 5523.54,2460 5542.73,2479.19 5611.75,2479.19 C3.1 5641.28,2482.44 5664.94,2506.1 U2.10
pads on no net: JTAG/DEBUG1.6 JTAG/DEBUG1.7 JTAG/DEBUG1.8 K1.5 K1.6 K1.7 K1.9 K1.12 S1.3 S1.4 U1A.1 U1A.2 U1A.9 U1A.10 U1A.15 U1A.16 U1A.21 U1B.1 U1B.2 U1B.9 U1B.10 U1B.15 U1B.16 U1B.21 U1C.1 U1C.2 U1C.9 U1C.10 U1C.15 U1C.16 U1C.21 U2.1 U2.2 U2.3 U2.4 U2.14 U2.15 U2.16 U2.17 U2.22 U2.23 U2.24 U2.27 U2.28 U2.29 U2.32 U2.33 U2.34 U2.35 U2.36 U2.37 U2.38 U2.45

## Polygon pours and split planes (outlines as drawn)
GND on Bottom Layer "Top Layer-No Net" (solid, remove dead copper, pour order 2): 5360,2070 5360,4695 7070,4695 7070,2325 6150,2325 6150,2070
GND on Top Layer "Bottom Layer-No Net" (solid, remove dead copper, pour order 21): 6105,2490 6105,2465 6145,2425 6300,2425 6605,2425 6665,2485 6665,2630 6105,2630
GND on Top Layer "Bottom Layer-No Net" (solid, remove dead copper, pour order 19): 6130,2345 7050,2345 7055,2350 7055,2470 6170,2470 6130,2430
GND on Top Layer "Bottom Layer-No Net" (solid, remove dead copper, pour order 15): 5385,2090 6140,2090 6140,2440 5995,2440 5995,2370 5990,2365 5860,2365 5385,2365
GND on Top Layer "Bottom Layer-No Net" (solid, remove dead copper, pour order 11): 5525,4640 6040,4640 6035,4635 6035,4455 5525,4455
GND on Top Layer "Bottom Layer-No Net" (solid, remove dead copper, pour order 11): 5525,4090 6040,4090 6035,4085 6035,3905 5525,3905
GND on Top Layer "Bottom Layer-No Net" (solid, remove dead copper, pour order 11): 5525,3540 6040,3540 6035,3535 6035,3355 5525,3355
GND on Top Layer "Bottom Layer-No Net" (solid, remove dead copper, pour order 9): 6205,4675 7050,4675 7050,2780 6615.42,2780 6205,2950
GND on Top Layer "Bottom Layer-No Net" (solid, remove dead copper, pour order 7): 5405,2580 5605,2580 5635,2550 5640,2550 5640,2445 5635,2440 5595,2400 5405,2400
GND on Top Layer "Bottom Layer-No Net" (solid, remove dead copper, pour order 3): 5650,3242.44 5650,3030 5880,3030 5945,3095 5945,3150 6010,3150 6010,3170 5950,3170 5925,3195 5865,3195 5845,3195 5797.56,3242.44
GND on Top Layer "Bottom Layer-No Net" (solid, remove dead copper, pour order 3): 5650,4342.44 5650,4130 5880,4130 5945,4195 5945,4250 6010,4250 6010,4270 5950,4270 5925,4295 5865,4295 5845,4295 5797.56,4342.44
GND on Top Layer "Bottom Layer-No Net" (solid, remove dead copper, pour order 3): 5650,3792.44 5650,3580 5880,3580 5945,3645 5945,3700 6010,3700 6010,3720 5950,3720 5925,3745 5865,3745 5845,3745 5797.56,3792.44

## Keep-outs
Keep-Out Layer:
  lines w10: 5385,2090 5385,4675 7050,4675 7050,2345 6130,2345 6130,2090 5385,2090

## Silkscreen, mask and mechanical layers (free items; w line width, h text height)
Top Overlay:
  text "CLK" at 5540,4575 h75
  text "Z AXIS" at 6210,4555 h150
  text "C AXIS" at 6630,4555 h150
  text "RST" at 5540,4475 h75
  text "DIO" at 5540,4380 h75
  text "3V3" at 5540,4270 h75
  text "GND" at 5540,4175 h75
  text "CLK" at 5540,4025 h75
  text "Y AXIS" at 6210,4010 h150
  text "B AXIS" at 6630,4010 h150
  text "RST" at 5540,3925 h75
  text "DIO" at 5540,3830 h75
  text "3V3" at 5540,3720 h75
  text "GND" at 5540,3625 h75
  text "CLK" at 5540,3475 h75
  text "X AXIS" at 6210,3460 h150
  text "A AXIS" at 6630,3460 h150
  text "RST" at 5540,3375 h75
  text "DIO" at 5540,3280 h75
  text "3V3" at 5540,3170 h75
  text "GND" at 5540,3075 h75
  text "Encoder Fin Model-B V1" at 5440,2945 h150
  text "Nov 2014" at 5440,2900 h60
  text "b" at 6010,2705 h150
  text "RX" at 6980,2565 h60
  text "TX" at 6980,2485 h60
  text "Designed By Adam Vadala-Roth" at 6315,2400 h60
Bottom Overlay:
  text "ENCA" at 6810,4490 h75
  text "ENCA" at 6310,4425 h75
  text "GND" at 6610,4425 h75
  text "GND" at 7035,4425 h75
  text "ENCi" at 6735,4390 h75 r90
  text "3V3" at 6600,4325 h75
  text "ENCi" at 6310,4320 h75
  text "3V3" at 7025,4320 h75
  text "ENCB" at 6315,4230 h75
  text "GND" at 6610,4220 h75
  text "GND" at 7035,4220 h75
  text "ENCB" at 6820,4160 h75
  text "ENCA" at 6810,3935 h75
  text "ENCA" at 6310,3875 h75
  text "GND" at 7035,3875 h75
  text "GND" at 6610,3870 h75
  text "ENCi" at 6735,3860 h75 r90
  text "ENCi" at 6310,3775 h75
  text "3V3" at 7030,3775 h75
  text "3V3" at 6595,3770 h75
  text "ENCB" at 6315,3670 h75
  text "GND" at 6610,3670 h75
  text "GND" at 7035,3670 h75
  text "ENCB" at 6810,3610 h75
  text "ENCA" at 6820,3380 h75
  text "ENCA" at 6310,3325 h75
  text "ENCi" at 6735,3325 h75 r90
  text "GND" at 6610,3320 h75
  text "GND" at 7035,3320 h75
  text "ENCi" at 6315,3225 h75
  text "3V3" at 6595,3220 h75
  text "3V3" at 7030,3220 h75
  text "ENCB" at 6315,3120 h75
  text "GND" at 6610,3120 h75
  text "GND" at 7035,3120 h75
  text "ENCB" at 6815,3060 h75
Mechanical 15:
  lines w10: 5360,2070 6150,2070 6150,2325 7070,2325 7070,4695 5360,4695 5360,2285 5360,2070